# Altium PCB NL_PCB_L.PcbDoc (part 2 of 2)
Units mm, origin at the board's own origin, x right, y up, seen from the top; angles counter-clockwise.
Board outline 403.1 x 406.53 mm, 2 copper layers (Top Layer, Bottom Layer); 55 components, 40 nets, 196 pads, 161 vias.
Unrouted connection lines stored in the file: 46.
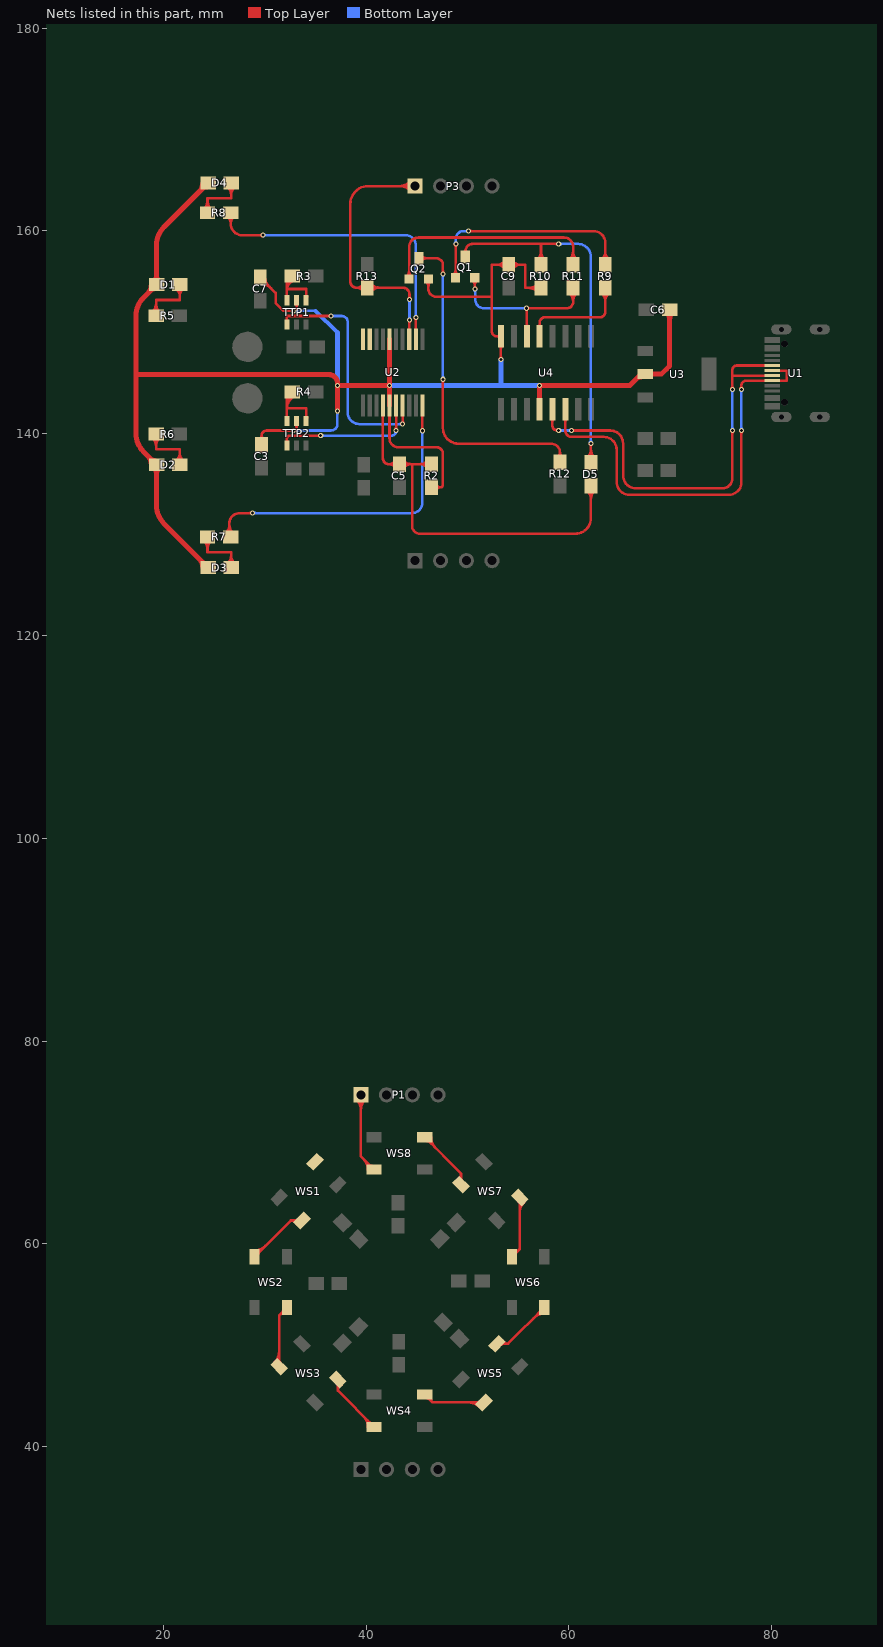
[diagram p2: the nets of this part, all layers, seen from the top]

## Via types
v1: diameter 0.5, hole 0.3, Top Layer to Bottom Layer, 117 vias
v2: diameter 0.7, hole 0.4, Top Layer to Bottom Layer, 40 vias
v3: diameter 0.8, hole 0.5, Top Layer to Bottom Layer, 4 vias

## Nets (pads, with @x,y where several pads share a name; then routed paths per layer and width w, separated by ;. In a path a pad name is that pad's centre, name@x,y a point inside that pad or via, vN(x,y) a via of type N, cw(c..) or ccw(c..) an arc to the next point about the centre after c; other vN are vias at no path point) (continued)
LED3: R7.2 U2.10 | length 35.1
  Top Layer w0.254: R7.2@26.133,130.128 ccw(c25.266,130.995) 26.492,130.995 ccw(c27.719,130.995) R7.2@26.851,130.128 ; R7.2@26.619,129.769 26.492,129.769 26.492,131.115 cw(c27.508,131.115) 27.508,132.131 v1(28.778,132.131) ; v1@28.691,132.044 ccw(c28.481,131.834) 28.481,132.131 ccw(c28.481,132.428) v1@28.691,132.218 ; v1@45.459,140.346 ccw(c45.249,140.556) 45.546,140.556 ccw(c45.843,140.556) v1@45.633,140.346 ; v1(45.546,140.259) U2.10@45.546,142.75
  Bottom Layer w0.254: v1(28.778,132.131) 44.53,132.131 ccw(c44.53,133.147) 45.546,133.147 v1(45.546,140.259) ; v1@28.865,132.044 cw(c29.075,131.834) 29.075,132.131 cw(c29.075,132.428) v1@28.865,132.218 ; v1@45.459,140.172 cw(c45.249,139.962) 45.546,139.962 cw(c45.843,139.962) v1@45.633,140.172
LED4: R8.2 U2.12 | length 33.2
  Top Layer w0.254: R8.2@26.299,161.378 cw(c25.753,160.706) 26.619,160.706 ; R8.2@26.619,161.773 26.619,160.706 ; R8.2@26.939,161.378 ccw(c27.485,160.706) 26.619,160.706 ; v1@29.707,159.476 ccw(c29.497,159.266) 29.497,159.563 ccw(c29.497,159.86) v1@29.707,159.65 ; v1(29.794,159.563) 27.762,159.563 cw(c27.762,160.706) 26.619,160.706 ; v1@44.809,151.348 cw(c44.599,151.138) 44.896,151.138 cw(c45.193,151.138) v1@44.983,151.348 ; U2.12@44.896,149.3 v1(44.896,151.435)
  Bottom Layer w0.254: v1(29.794,159.563) 43.88,159.563 cw(c43.88,158.547) 44.896,158.547 v1(44.896,151.435) ; v1@29.881,159.476 cw(c30.091,159.266) 30.091,159.563 cw(c30.091,159.86) v1@29.881,159.65 ; v1@44.809,151.522 ccw(c44.599,151.732) 44.896,151.732 ccw(c45.193,151.732) v1@44.983,151.522
MCU_RTS: C5.2 D5.1 R2.1 U2.4 | length 45.9
  Top Layer w0.254: U2.4@41.646,142.75 41.646,137.541 ccw(c42.231,137.541) 42.231,136.957 ; C5.2@42.883,136.641 ccw(c42.231,136.124) 42.231,136.957 ; C5.2@42.883,137.272 cw(c42.231,137.789) 42.231,136.957 ; C5.2@43.641,136.598 cw(c44.508,135.73) 44.508,136.957 cw(c44.508,138.183) C5.2@43.641,137.316 ; R2.1@46.097,136.598 ccw(c45.23,135.73) 45.23,136.957 ccw(c45.23,138.183) R2.1@46.097,137.316 ; R2.1@46.457,136.957 44.526,136.957 ; D5.1@61.82,134.337 cw(c60.953,133.47) 62.179,133.47 cw(c63.406,133.47) D5.1@62.538,134.337 ; D5.1@62.179,134.823 62.179,131.623 cw(c60.655,131.623) 60.655,130.099 45.288,130.099 cw(c45.288,130.861) 44.526,130.861 44.526,136.957 ; 42.231,136.957 C5.2@43.282,136.957 44.526,136.957
NET2: WS1.2
NetD1_2: D1.2 R5.1 | length 9.3
  Top Layer w0.254: R5.1@18.894,151.972 ccw(c18.027,152.839) 19.253,152.839 ccw(c20.48,152.839) R5.1@19.612,151.972 ; R5.1@19.253,151.613 19.253,153.162 21.59,153.162 D1.2@21.59,154.686 ; D1.2@21.231,154.327 cw(c20.364,153.46) 21.59,153.46 cw(c22.816,153.46) D1.2@21.949,154.327
NetD2_2: D2.2 R6.1 | length 9.2
  Top Layer w0.254: R6.1@18.894,139.569 cw(c18.027,138.702) 19.253,138.702 cw(c20.48,138.702) R6.1@19.612,139.569 ; R6.1@19.253,139.929 19.253,138.43 21.59,138.43 D2.2@21.59,136.906 ; D2.2@21.231,137.265 ccw(c20.364,138.132) 21.59,138.132 ccw(c22.816,138.132) D2.2@21.949,137.265
NetD3_2: D3.2 R7.1 | length 9.2
  Top Layer w0.254: R7.1@23.974,129.409 cw(c23.107,128.542) 24.333,128.542 cw(c25.56,128.542) R7.1@24.692,129.409 ; R7.1@24.333,129.769 24.333,128.27 26.67,128.27 D3.2@26.67,126.746 ; D3.2@26.311,127.105 ccw(c25.444,127.972) 26.67,127.972 ccw(c27.896,127.972) D3.2@27.029,127.105
NetD4_2: D4.2 R8.1 | length 9.1
  Top Layer w0.254: R8.1@23.974,162.132 ccw(c23.107,162.999) 24.333,162.999 ccw(c25.56,162.999) R8.1@24.692,162.132 ; R8.1@24.333,161.773 24.333,163.195 26.67,163.195 D4.2@26.67,164.719 ; D4.2@26.311,164.36 cw(c25.444,163.493) 26.67,163.493 cw(c27.896,163.493) D4.2@27.029,164.36
NetD5_2: D5.2 Q1.C R10.2 | length 42.9
  Top Layer w0.254: Q1.C@49.606,157.868 ccw(c49.365,158.286) 49.831,158.161 ; Q1.C@49.771,157.404 49.771,157.937 cw(c50.533,157.937) 50.533,158.699 57.252,158.699 ; 49.832,158.164 ccw(c50.1,158.092) Q1.C@49.95,157.859 ; R10.2@56.892,157.128 ccw(c56.025,157.995) 57.252,157.995 ccw(c58.478,157.995) R10.2@57.611,157.128 ; R10.2@57.252,156.642 57.252,158.699 ; v1@58.917,158.612 ccw(c58.707,158.402) 58.707,158.699 ccw(c58.707,158.996) v1@58.917,158.786 ; v1(59.004,158.699) 57.252,158.699 ; D5.2@61.82,137.595 ccw(c60.953,138.463) 62.179,138.463 ccw(c63.406,138.463) D5.2@62.538,137.595 ; v1@62.092,138.927 cw(c61.882,138.717) 62.179,138.717 cw(c62.476,138.717) v1@62.266,138.927 ; D5.2@62.179,137.109 v1(62.179,139.014)
  Bottom Layer w0.254: v1(59.004,158.699) 60.909,158.699 cw(c60.909,157.429) 62.179,157.429 v1(62.179,139.014) ; v1@59.091,158.612 cw(c59.301,158.402) 59.301,158.699 cw(c59.301,158.996) v1@59.091,158.786 ; v1@62.092,139.101 ccw(c61.882,139.311) 62.179,139.311 ccw(c62.476,139.311) v1@62.266,139.101
NetQ1_B: Q1.B R9.2 | length 27
  Top Layer w0.254: Q1.B@48.573,155.605 ccw(c47.917,156.261) 48.844,156.261 ; v1@48.757,158.612 cw(c48.547,158.402) 48.844,158.402 cw(c49.141,158.402) v1@48.931,158.612 ; Q1.B@48.844,155.27 v1(48.844,158.699) ; 48.844,156.077 ccw(c49.511,156.077) Q1.B@49.04,155.605 ; v1(50.114,159.969) 62.433,159.969 cw(c62.433,158.801) 63.602,158.801 R9.2@63.602,156.642 ; v1@50.201,159.882 cw(c50.411,159.672) 50.411,159.969 cw(c50.411,160.266) v1@50.201,160.056 ; R9.2@63.242,157.128 ccw(c62.375,157.995) 63.602,157.995 ccw(c64.828,157.995) R9.2@63.961,157.128
  Bottom Layer w0.254: v1@48.757,158.786 ccw(c48.547,158.996) 48.844,158.996 ccw(c49.141,158.996) v1@48.931,158.786 ; v1(48.844,158.699) 48.844,159.207 cw(c49.606,159.207) 49.606,159.969 v1(50.114,159.969) ; v1@50.027,159.882 ccw(c49.817,159.672) 49.817,159.969 ccw(c49.817,160.266) v1@50.027,160.056
NetQ1_e: Q1.E R11.2 U4.14 | length 22.7
  Top Layer w0.254: Q1.E@50.478,155.138 cw(c49.914,154.575) 50.711,154.575 cw(c51.508,154.575) Q1.E@50.945,155.138 ; 50.711,154.643 ccw(c51.138,154.643) v1@50.836,154.341 ; Q1.E@50.711,155.372 50.711,154.254 v1(50.749,154.254) ; U4.14@55.732,150.496 ccw(c55.437,150.791) 55.855,150.791 ccw(c56.272,150.791) U4.14@55.977,150.496 ; v1@55.742,152.262 cw(c55.471,151.991) 55.855,151.991 ; U4.14@55.855,149.574 55.855,152.349 59.817,152.349 ccw(c59.817,152.959) 60.427,152.959 R11.2@60.427,154.356 ; v1@55.916,152.262 cw(c56.126,152.052) 56.126,152.349 cw(c56.126,152.646) v1@55.916,152.436 ; R11.2@60.067,153.87 cw(c59.2,153.002) 60.427,153.002 cw(c61.653,153.002) R11.2@60.786,153.87
  Bottom Layer w0.254: v1@50.662,154.167 cw(c50.452,153.957) 50.749,153.957 cw(c51.046,153.957) v1@50.836,154.167 ; v1(50.749,154.254) 50.749,153.238 ccw(c51.638,153.238) 51.638,152.349 v1(55.829,152.349) ; v1@55.742,152.262 ccw(c55.532,152.052) 55.532,152.349 ccw(c55.532,152.646) v1@55.742,152.436
NetQ2_B: Q2.B R11.1 | length 25.4
  Top Layer w0.254: Q2.B@44.001,155.478 ccw(c43.437,156.042) 44.234,156.042 ccw(c45.031,156.042) Q2.B@44.468,155.478 ; Q2.B@44.234,155.245 44.234,158.407 cw(c45.161,158.407) 45.161,159.334 59.512,159.334 cw(c59.512,158.42) 60.427,158.42 R11.1@60.427,156.642 ; R11.1@60.067,157.128 ccw(c59.2,157.995) 60.427,157.995 ccw(c61.653,157.995) R11.1@60.786,157.128
NetQ2_C: Q2.C R12.2 | length 36.8
  Top Layer w0.254: Q2.C@45.199,157.277 46.939,157.277 cw(c46.939,156.642) 47.574,156.642 v1(47.574,155.753) ; Q2.C@45.433,157.043 cw(c45.996,156.48) 45.996,157.277 cw(c45.996,158.074) Q2.C@45.433,157.51 ; v1@47.487,145.252 cw(c47.277,145.042) 47.574,145.042 cw(c47.871,145.042) v1@47.661,145.252 ; v1@47.487,155.84 ccw(c47.277,156.05) 47.574,156.05 ccw(c47.871,156.05) v1@47.661,155.84 ; v1(47.574,145.339) 47.574,140.513 ccw(c49.098,140.513) 49.098,138.989 58.242,138.989 cw(c58.242,138.1) 59.131,138.1 ; R12.2@58.896,137.712 ccw(c58.694,138.1) 59.131,138.1 ; R12.2@59.131,137.135 59.131,138.1 ; R12.2@59.366,137.712 cw(c59.569,138.1) 59.131,138.1
  Bottom Layer w0.254: v1@47.487,145.426 ccw(c47.277,145.636) 47.574,145.636 ccw(c47.871,145.636) v1@47.661,145.426 ; v1@47.487,155.666 cw(c47.277,155.456) 47.574,155.456 cw(c47.871,155.456) v1@47.661,155.666 ; v1(47.574,145.339) v1(47.574,155.753)
NetR3_2: R3.2 TTP1.4 TTP1.6 | length 9.4
  Top Layer w0.254: TTP1.6@32.085,153.48 ccw(c31.875,153.69) 32.172,153.69 ccw(c32.469,153.69) TTP1.6@32.259,153.48 ; TTP1.6@32.172,153.143 32.172,154.254 ; 32.172,154.188 cw(c33.092,154.188) R3.2@32.767,155.049 ; 32.172,154.555 cw(c32.954,154.555) R3.2@32.678,155.287 ; R3.2@32.172,154.922 cw(c32.815,154.922) R3.2@32.588,155.524 ; R3.2@32.741,155.499 32.172,154.93 32.172,154.254 ; TTP1.4@33.985,153.48 ccw(c33.775,153.69) 34.072,153.69 ccw(c34.369,153.69) TTP1.4@34.159,153.48 ; TTP1.4@34.072,153.143 34.072,154.254 32.172,154.254
NetR4_2: R4.2 TTP2.4 TTP2.6 | length 10.1
  Top Layer w0.254: TTP2.6@32.085,141.542 ccw(c31.875,141.752) 32.172,141.752 ccw(c32.469,141.752) TTP2.6@32.259,141.542 ; TTP2.6@32.172,141.205 32.172,142.443 ; 32.172,142.392 cw(c33.694,142.392) R4.2@32.865,143.668 ; 32.172,142.859 cw(c33.39,142.859) R4.2@32.727,143.881 ; 32.172,143.327 cw(c33.086,143.327) R4.2@32.588,144.094 ; R4.2@32.172,143.551 32.172,142.443 ; TTP2.4@33.985,141.542 ccw(c33.775,141.752) 34.072,141.752 ccw(c34.369,141.752) TTP2.4@34.159,141.542 ; TTP2.4@34.072,141.205 34.072,142.484 32.212,142.484 32.172,142.443
NetR9_1: R9.1 U4.13 | length 13.4
  Top Layer w0.254: U4.13@57.002,150.496 ccw(c56.707,150.791) 57.125,150.791 ccw(c57.542,150.791) U4.13@57.247,150.496 ; U4.13@57.125,149.574 57.125,150.927 cw(c57.658,150.927) 57.658,151.46 63.068,151.46 ccw(c63.068,151.994) 63.602,151.994 R9.1@63.602,154.356 ; R9.1@63.242,153.87 cw(c62.375,153.002) 63.602,153.002 cw(c64.828,153.002) R9.1@63.961,153.87
NetWS1_4: WS1.4 WS2.2 | length 9.7
  Top Layer w0.254: WS2.2@28.982,58.71 32.563,62.291 ; WS2.2@28.982,59.079 ccw(c28.982,59.97) 29.612,59.34 ; WS2.2@28.982,59.333 ccw(c28.982,60.837) 30.045,59.774 ; WS2.2@29.355,58.96 cw(c29.652,58.96) WS2.2@29.442,59.17 ; WS1.4@32.99,62.291 cw(c32.99,61.843) WS1.4@33.384,62.058 ; WS1.4@33.014,62.291 ccw(c33.014,62.588) WS1.4@33.224,62.378 ; WS1.4@33.161,61.936 ccw(c32.563,61.611) 32.563,62.291 ; WS1.4@33.665,62.291 32.563,62.291
NetWS2_4: WS2.4 WS3.2 | length 9.7
  Top Layer w0.254: WS3.2@30.962,48.307 ccw(c29.898,49.37) 31.402,49.37 ; WS3.2@31.141,48.127 ccw(c30.511,48.757) 31.402,48.757 ; WS3.2@31.402,47.866 31.402,52.931 ; WS3.2@31.402,48.517 ccw(c31.699,48.517) WS3.2@31.489,48.307 ; WS2.4@31.705,53.233 cw(c32.021,52.916) WS2.4@32.148,53.346 ; WS2.4@31.722,53.25 ccw(c31.512,53.46) WS2.4@31.809,53.46 ; WS2.4@32.076,53.102 ccw(c31.884,52.449) 31.402,52.931 ; WS2.4@32.182,53.71 31.402,52.931
NetWS3_4: WS3.4 WS4.2 | length 9.8
  Top Layer w0.254: WS3.4@37.114,46.153 cw(c36.904,45.943) WS3.4@37.2,45.943 ; 37.2,45.475 cw(c37.91,45.475) WS3.4@37.561,46.092 ; WS3.4@37.2,45.91 cw(c37.664,45.91) WS3.4@37.436,46.313 ; WS3.4@37.2,46.594 37.2,45.491 WS4.2@40.782,41.91 ; 39.718,42.974 cw(c38.655,41.91) WS4.2@40.159,41.91 ; 40.152,42.54 cw(c39.522,41.91) WS4.2@40.413,41.91 ; WS4.2@40.322,42.37 ccw(c40.532,42.58) WS4.2@40.532,42.283
NetWS4_4: WS4.4 WS5.2 | length 9.7
  Top Layer w0.254: WS4.4@45.782,45.11 46.561,44.331 ; WS4.4@46.032,44.737 cw(c46.032,44.44) WS4.4@46.242,44.65 ; WS4.4@46.146,45.077 ccw(c46.575,44.95) WS4.4@46.259,44.633 ; WS4.4@46.389,45.005 ccw(c47.042,44.812) 46.561,44.331 ; 50.121,44.331 cw(c50.121,42.827) WS5.2@51.185,43.89 ; 50.735,44.331 cw(c50.735,43.44) WS5.2@51.365,44.07 ; WS5.2@50.975,44.331 ccw(c50.975,44.628) WS5.2@51.185,44.418 ; WS5.2@51.625,44.331 46.561,44.331
NetWS5_4: WS5.4 WS6.2 | length 9.7
  Top Layer w0.254: WS5.4@52.898,50.129 54,50.129 ; WS5.4@53.18,50.363 ccw(c53.573,50.577) WS5.4@53.573,50.129 ; WS5.4@53.339,50.042 cw(c53.549,49.832) WS5.4@53.549,50.129 ; WS5.4@53.403,50.484 ccw(c54,50.81) 54,50.129 ; 56.518,52.647 cw(c57.582,51.583) WS6.2@57.582,53.087 ; 56.952,53.08 cw(c57.582,52.45) WS6.2@57.582,53.341 ; WS6.2@57.122,53.25 ccw(c56.912,53.46) WS6.2@57.209,53.46 ; WS6.2@57.582,53.71 54,50.129
NetWS6_4: WS6.4 WS7.2 | length 9.7
  Top Layer w0.254: WS6.4@54.382,58.71 55.161,59.49 ; WS6.4@54.415,59.074 ccw(c54.542,59.504) WS6.4@54.859,59.187 ; WS6.4@54.487,59.318 ccw(c54.68,59.971) 55.161,59.49 ; WS6.4@54.755,58.96 cw(c55.052,58.96) WS6.4@54.842,59.17 ; WS7.2@55.074,64.114 cw(c54.864,63.904) WS7.2@55.161,63.904 ; 55.161,63.05 cw(c56.665,63.05) WS7.2@55.602,64.114 ; 55.161,63.663 cw(c56.052,63.663) WS7.2@55.422,64.293 ; WS7.2@55.161,64.554 55.161,59.49
NetWS7_4: WS7.4 WS8.2 | length 9.7
  Top Layer w0.254: WS8.2@45.782,70.51 49.363,66.929 ; WS8.2@46.032,70.137 cw(c46.032,69.84) WS8.2@46.242,70.05 ; WS8.2@46.151,70.51 ccw(c47.041,70.51) 46.412,69.88 ; WS8.2@46.405,70.51 ccw(c47.909,70.51) 46.845,69.447 ; WS7.4@49.008,66.331 ccw(c48.682,66.929) 49.363,66.929 ; WS7.4@49.129,66.108 ccw(c48.915,66.501) WS7.4@49.363,66.501 ; WS7.4@49.363,65.827 49.363,66.929 ; WS7.4@49.363,66.477 ccw(c49.66,66.477) WS7.4@49.45,66.267
PA0: TTP2.1 U2.6 | length 16.7
  Top Layer w0.254: TTP2.1@32.085,139.142 ccw(c31.875,139.352) 32.172,139.352 ccw(c32.469,139.352) TTP2.1@32.259,139.142 ; TTP2.1@32.172,138.805 32.172,139.487 cw(c32.461,139.487) 32.461,139.776 v1(35.509,139.776) ; v1@35.422,139.689 ccw(c35.212,139.479) 35.212,139.776 ccw(c35.212,140.073) v1@35.422,139.863 ; v1@42.859,140.371 ccw(c42.649,140.581) 42.946,140.581 ccw(c43.243,140.581) v1@43.033,140.371 ; v1(42.946,140.284) U2.6@42.946,142.75
  Bottom Layer w0.254: v1(35.509,139.776) 42.494,139.776 ccw(c42.494,140.228) 42.946,140.228 v1(42.946,140.284) ; v1@35.596,139.689 cw(c35.806,139.479) 35.806,139.776 cw(c35.806,140.073) v1@35.596,139.863 ; v1@42.852,140.205 cw(c42.702,140.077) 42.892,140.026 ; 42.892,140.027 cw(c43.131,139.963) v1@43.008,140.178
PA1: TTP1.1 U2.7 | length 26.3
  Top Layer w0.254: TTP1.1@32.085,151.08 ccw(c31.875,151.29) 32.172,151.29 ccw(c32.469,151.29) TTP1.1@32.259,151.08 ; TTP1.1@32.172,150.743 32.172,151.552 32.207,151.587 v1(36.525,151.587) ; v1@36.438,151.5 ccw(c36.228,151.29) 36.228,151.587 ccw(c36.228,151.884) v1@36.438,151.674 ; v1@43.509,141.006 ccw(c43.299,141.216) 43.596,141.216 ccw(c43.893,141.216) v1@43.683,141.006 ; v1(43.596,140.919) U2.7@43.596,142.75
  Bottom Layer w0.254: v1(36.525,151.587) 37.567,151.587 cw(c37.567,150.978) 38.176,150.978 38.176,142.062 ccw(c39.319,142.062) 39.319,140.919 v1(43.596,140.919) ; v1@36.612,151.5 cw(c36.822,151.29) 36.822,151.587 cw(c36.822,151.884) v1@36.612,151.674 ; v1@43.509,140.832 ccw(c43.299,140.622) 43.299,140.919 ccw(c43.299,141.216) v1@43.509,141.006
RGB_CTRL: P1.1 P3.1 R13.1 U2.13 WS8.4 | length 48.8
  Top Layer w0.254: P1.1@39.031,74.261 cw(c37.968,73.197) 39.472,73.197 cw(c40.976,73.197) P1.1@39.912,74.261 ; P1.1@39.211,74.44 cw(c38.581,73.811) 39.472,73.811 cw(c40.362,73.811) P1.1@39.733,74.44 ; P1.1@39.472,74.701 39.472,68.62 WS8.4@40.782,67.31 ; R13.1@39.712,154.061 ccw(c39.04,153.515) 39.04,154.381 ; R13.1@39.712,154.701 cw(c39.04,155.247) 39.04,154.381 ; 39.718,68.374 cw(c38.655,67.31) WS8.4@40.159,67.31 ; 40.152,67.94 cw(c39.522,67.31) WS8.4@40.413,67.31 ; WS8.4@40.322,67.77 ccw(c40.532,67.98) WS8.4@40.532,67.683 ; R13.1@40.466,154.022 cw(c41.333,153.155) 41.333,154.381 cw(c41.333,155.608) R13.1@40.466,154.74 ; v1@44.185,153.3 ccw(c43.975,153.51) 44.272,153.51 ccw(c44.569,153.51) v1@44.359,153.3 ; U2.13@44.246,149.3 44.246,151.181 v1(44.272,151.181) ; 44.246,150.821 cw(c44.632,150.821) v1@44.359,151.094 ; v1(44.272,153.213) 44.272,153.721 ccw(c43.612,153.721) 43.612,154.381 R13.1@40.107,154.381 39.04,154.381 ; P3.1@44.365,163.974 ccw(c43.302,162.91) 43.302,164.414 ccw(c43.302,165.918) P3.1@44.365,164.855 ; P3.1@44.545,164.153 ccw(c43.915,163.523) 43.915,164.414 ccw(c43.915,165.305) P3.1@44.545,164.675 ; P3.1@44.806,164.414 40.208,164.414 ccw(c40.208,162.636) 38.43,162.636 38.43,154.991 ccw(c39.04,154.991) 39.04,154.381
  Bottom Layer w0.254: v1@44.185,151.268 ccw(c43.975,151.478) 44.272,151.478 ccw(c44.569,151.478) v1@44.359,151.268 ; v1@44.185,153.126 cw(c43.975,152.916) 44.272,152.916 cw(c44.569,152.916) v1@44.359,153.126 ; v1(44.272,151.181) v1(44.272,153.213)
SWCLK: U2.20
SWDIO: U2.19
UD+: U1.5 U1.7 U4.5 | length 48.7
  Top Layer w0.254: U4.5@58.272,141.451 cw(c58.038,141.217) 58.369,141.217 ; 58.369,141.095 cw(c58.874,141.095) U4.5@58.517,141.451 ; U4.5@58.369,142.374 58.369,140.792 ccw(c58.877,140.792) v1@58.877,140.284 ; 58.678,140.338 ccw(c58.756,140.629) v1@58.932,140.384 ; v1(60.274,140.284) 64.084,140.284 cw(c64.084,139.014) 65.354,139.014 65.354,135.839 ccw(c66.624,135.839) 66.624,134.569 75.166,134.569 ccw(c75.166,135.552) 76.149,135.552 v1(76.149,140.284) ; v1@60.361,140.197 cw(c60.571,139.987) 60.571,140.284 cw(c60.571,140.581) v1@60.361,140.371 ; v1@76.062,140.197 cw(c75.852,139.987) 76.149,139.987 cw(c76.446,139.987) v1@76.236,140.197 ; v1@76.062,144.435 ccw(c75.852,144.645) 76.149,144.645 ccw(c76.446,144.645) v1@76.236,144.435 ; v1(76.149,144.348) 76.149,145.698 ; U1.7@80.575,145.698 76.149,145.698 ; U1.5@80.575,146.698 76.594,146.698 ccw(c76.594,146.253) 76.149,146.253 76.149,145.698
  Bottom Layer w0.254: v1(59.004,140.284) v1(60.274,140.284) ; v1@59.091,140.197 cw(c59.301,139.987) 59.301,140.284 cw(c59.301,140.581) v1@59.091,140.371 ; v1@60.187,140.197 ccw(c59.977,139.987) 59.977,140.284 ccw(c59.977,140.581) v1@60.187,140.371 ; v1@76.062,140.371 ccw(c75.852,140.581) 76.149,140.581 ccw(c76.446,140.581) v1@76.236,140.371 ; v1@76.062,144.261 cw(c75.852,144.051) 76.149,144.051 cw(c76.446,144.051) v1@76.236,144.261 ; v1(76.149,140.284) v1(76.149,144.348)
UD-: U1.6 U1.8 U4.6 | length 44.2
  Top Layer w0.254: U4.6@59.542,141.451 cw(c59.247,141.156) 59.665,141.156 cw(c60.082,141.156) U4.6@59.787,141.451 ; U4.6@59.665,142.374 59.665,140.259 ccw(c60.274,140.259) 60.274,139.649 63.449,139.649 cw(c63.449,138.379) 64.719,138.379 64.719,135.204 ccw(c65.989,135.204) 65.989,133.934 75.806,133.934 ccw(c75.806,135.166) 77.038,135.166 v1(77.038,140.284) ; v1@76.951,140.197 cw(c76.741,139.987) 77.038,139.987 cw(c77.335,139.987) v1@77.125,140.197 ; v1@76.951,144.435 ccw(c76.741,144.645) 77.038,144.645 ccw(c77.335,144.645) v1@77.125,144.435 ; v1(77.038,144.348) 77.038,144.706 cw(c77.531,144.706) 77.531,145.198 U1.8@80.075,145.198 81.509,145.198 81.509,146.198 U1.6@80.575,146.198
  Bottom Layer w0.254: v1@76.951,140.371 ccw(c76.741,140.581) 77.038,140.581 ccw(c77.335,140.581) v1@77.125,140.371 ; v1@76.951,144.261 cw(c76.741,144.051) 77.038,144.051 cw(c77.335,144.051) v1@77.125,144.261 ; v1@77.013,140.31 77.013,140.208 77.038,140.183 v1(77.038,140.284) v1(77.038,144.348)
VCC: C3.2 C6.2 C7.2 C9.2 D1.1 D2.1 D3.1 D4.1 Q2.E R2.2 R10.1 TTP1.5 TTP2.5 U2.5 U2.16 U3.2 U4.4 U4.16 | length 212.4
  Top Layer w0.254: C3.2@29.472,139.483 ccw(c29.35,139.776) 29.667,139.776 ; C7.2@29.54,154.762 cw(c29.54,153.229) 30.624,154.313 ; C7.2@29.54,155.016 cw(c29.54,154.096) 30.191,154.747 ; C7.2@29.54,155.397 31.064,153.873 31.064,152.857 31.826,152.095 v1(32.842,152.095) 33.122,152.375 TTP1.5@33.122,153.143 ; C3.2@29.667,139.205 29.667,139.776 ; C3.2@29.863,139.483 cw(c29.985,139.776) 29.667,139.776 ; C7.2@30.048,155.27 ccw(c30.968,155.27) 30.318,154.62 ; v1@32.755,140.197 ccw(c32.545,139.987) 32.545,140.284 ccw(c32.545,140.581) v1@32.755,140.371 ; v1@32.755,152.008 ccw(c32.545,151.798) 32.545,152.095 ccw(c32.545,152.392) v1@32.755,152.182 ; v1@32.842,152.218 ccw(c32.842,152.515) 33.052,152.305 ccw(c33.262,152.095) v1@32.965,152.095 ; TTP2.5@33.035,140.868 cw(c32.825,140.658) 33.122,140.658 cw(c33.419,140.658) TTP2.5@33.209,140.868 ; TTP1.5@33.035,152.806 cw(c32.825,152.596) 33.122,152.596 cw(c33.419,152.596) TTP1.5@33.209,152.806 ; TTP2.5@33.122,141.205 33.122,140.564 cw(c32.842,140.564) v1(32.842,140.284) 30.175,140.284 ccw(c30.175,139.776) 29.667,139.776 ; U2.5@42.296,142.75 42.296,139.497 ccw(c43.16,139.497) 43.16,138.633 46.914,138.633 cw(c46.914,137.973) 47.574,137.973 47.574,134.925 cw(c47.32,134.925) 47.32,134.671 ; Q2.E@45.906,155.011 cw(c45.342,154.448) 46.139,154.448 cw(c46.936,154.448) Q2.E@46.373,155.011 ; Q2.E@46.139,155.245 46.139,154.254 ccw(c46.901,154.254) 46.901,153.492 52.4,153.492 ; R2.2@46.457,134.671 47.32,134.671 ; R2.2@46.901,134.424 cw(c47.32,134.191) 47.32,134.671 ; R2.2@46.901,134.918 ccw(c47.32,135.151) 47.32,134.671 ; U4.16@53.19,149.454 ccw(c52.908,149.183) 52.908,149.574 ; U4.16@53.19,149.694 cw(c52.908,149.965) 52.908,149.574 ; U4.16@53.192,148.651 cw(c52.958,148.417) 53.289,148.417 ; v1@53.202,147.382 ccw(c52.992,147.592) 53.289,147.592 ccw(c53.586,147.592) v1@53.376,147.382 ; v1(53.289,147.295) 53.289,149.574 52.908,149.574 ; 53.289,148.295 cw(c53.794,148.295) U4.16@53.437,148.651 ; C9.2@53.717,156.283 ccw(c52.85,155.415) 52.85,156.642 ccw(c52.85,157.868) C9.2@53.717,157.001 ; C9.2@54.436,156.283 cw(c55.303,155.415) 55.303,156.642 cw(c55.303,157.868) C9.2@54.436,157.001 ; R10.1@56.892,153.997 ccw(c56.025,153.129) 56.025,154.356 ccw(c56.025,155.582) R10.1@56.892,154.715 ; R10.1@57.252,154.356 55.702,154.356 55.702,156.642 C9.2@54.077,156.642 52.4,156.642 52.4,153.492 ; U3.2@67.058,145.772 67.464,145.772 U3.2@67.539,145.847 ; 52.4,153.492 52.4,150.082 ccw(c52.908,150.082) 52.908,149.574
  Top Layer w0.5: 18.43,137.78 cw(c17.556,136.906) D2.1@18.792,136.906 ; 18.43,153.812 ccw(c17.556,154.686) D1.1@18.792,154.686 ; D2.1@18.737,137.473 ccw(c19.177,137.914) D2.1@19.177,137.291 ; D1.1@18.737,154.119 cw(c19.177,153.678) D1.1@19.177,154.301 ; D2.1@19.032,136.634 cw(c18.375,135.977) 19.304,135.977 cw(c20.233,135.977) D2.1@19.576,136.634 ; D1.1@19.032,154.958 ccw(c18.375,155.615) 19.304,155.615 ccw(c20.233,155.615) D1.1@19.576,154.958 ; 20.048,160.383 ccw(c21.844,158.587) 19.304,158.587 D1.1@19.304,154.686 18.016,153.398 ccw(c19.812,151.602) 17.272,151.602 17.272,145.796 ; 23.51,127.62 cw(c22.636,126.746) D3.1@23.872,126.746 ; D3.1@23.817,127.313 ccw(c24.257,127.754) D3.1@24.257,127.131 ; D3.1@24.384,126.746 20.048,131.082 cw(c21.844,132.878) 19.304,132.878 D2.1@19.304,136.906 18.016,138.194 cw(c19.812,139.99) 17.272,139.99 17.272,145.796 ; v1(37.16,142.189) v1(37.16,144.729) ; v1(42.291,144.729) v1(37.16,144.729) ; U2.5@42.296,142.75 U2.16@42.296,149.3 ; U4.4@57.125,142.374 v1(57.125,144.729) 66.015,144.729 U3.2@67.058,145.772 ; 66.607,145.322 cw(c67.284,144.645) U3.2@67.284,145.602 ; U3.2@67.539,145.847 69.139,145.847 69.952,146.66 C6.2@69.952,152.197 ; U3.2@67.967,145.674 cw(c68.385,145.255) 68.385,145.847 cw(c68.385,146.438) U3.2@67.967,146.02 ; C6.2@69.679,151.925 cw(c69.022,151.267) 69.952,151.267 cw(c70.881,151.267) C6.2@70.224,151.925 ; 17.272,145.796 36.322,145.796 cw(c36.322,144.958) 37.16,144.958 v1(37.16,144.729)
  Top Layer w0.52: 20.048,160.383 D4.1@24.384,164.719 ; 23.527,163.862 ccw(c22.67,164.719) D4.1@23.882,164.719 ; D4.1@23.834,164.169 cw(c24.257,163.745) D4.1@24.257,164.344
  Bottom Layer w0.254: v1(32.842,140.284) 36.525,140.284 ccw(c36.525,140.919) 37.16,140.919 v1(37.16,142.189) ; v1(32.842,152.095) 35.001,152.095 ; v1@32.929,140.197 cw(c33.139,139.987) 33.139,140.284 cw(c33.139,140.581) v1@32.929,140.371 ; v1@32.929,152.008 cw(c33.139,151.798) 33.139,152.095 cw(c33.139,152.392) v1@32.929,152.182 ; v1@37.073,142.102 cw(c36.863,141.892) 37.16,141.892 cw(c37.457,141.892) v1@37.247,142.102
  Bottom Layer w0.4: 35.001,152.095 37.16,149.936
  Bottom Layer w0.5: v1(37.16,144.729) 37.16,149.936 ; v1(42.291,144.729) 53.289,144.729 ; v1(53.289,147.295) 53.289,144.729 ; v1(57.125,144.729) 53.289,144.729
pads on no net: U1. U1.0 U1.1@81.295,143.058 U1.3 U1.4 U1.9 U1.10 U2.2 U2.3 U2.11 U2.14 U3.4 U4.7 U4.8 U4.9 U4.10 U4.11 U4.12

## Keep-outs
Keep-Out Layer:
  circle w0.127: c43.298,56.21 r1
  circle w0.127: c58.279,72.202 r1.5
  circle w0.127: c28.279,72.202 r1.5
  circle w0.127: c28.279,40.202 r1.5
  circle w0.127: c58.279,40.202 r1.5
  circle w0.127: c43.279,56.202 r33
  circle w0.127: c63.613,161.93 r1.5
  circle w0.127: c33.613,161.93 r1.5
  circle w0.127: c33.613,129.93 r1.5
  circle w0.127: c63.613,129.93 r1.5
  lines w0.127: 87.605,140.945 87.605,150.927 ; 87.613,140.93 78.613,140.93 78.613,132.182 cw(c48.613,145.93) 53.599,113.309 ccw(c48.613,112.93) 43.628,113.309 cw(c48.613,145.93) 43.628,178.551 ccw(c48.613,178.93) 53.599,178.551 cw(c48.613,145.93) 78.613,159.678 78.613,150.93 87.613,150.93

## Silkscreen, mask and mechanical layers (free items; w line width, h text height)
Top Overlay:
  lines w0.203: 41.097,76.378 41.097,78.283 48.336,78.283 ; 46.482,166.091 46.482,167.996 53.721,167.996 ; 48.336,78.283 48.336,80.188 38.176,80.188 38.176,78.283 38.176,76.378 48.336,76.378 48.336,78.283 ; 53.721,167.996 53.721,166.091 43.561,166.091 43.561,167.996 43.561,169.901 53.721,169.901 53.721,167.996 ; 38.202,34.366 38.202,36.144 48.362,36.144 48.362,34.366 38.202,34.366 ; 43.51,124.028 53.67,124.028 53.67,125.806 43.51,125.806 43.51,124.028
  text "RGB-CTRL" at 44.069,168.504 h1.02
  text "VCC-5V" at 47.244,166.472 h1.02
  text "GND" at 47.066,124.409 h1.02
  text "RGB-CTRL" at 38.684,78.791 h1.02
  text "VCC-5V" at 41.859,76.759 h1.02
  text "GND" at 41.758,34.747 h1.02
Bottom Overlay:
  drawing of 5738 lines, arcs and shapes, not listed
  text "Night Light V1.2" at 75.489,150.139 h1.52
  text "2019-01-18" at 74.447,147.574 h1.52
Mechanical 1:
  circle w0.127: c919.383,745.614 r1
  circle w0.127: c959.383,761.614 r1.5
  circle w0.127: c929.383,761.614 r1.5
  circle w0.127: c929.383,729.614 r1.5
  circle w0.127: c959.383,729.614 r1.5
  circle w0.127: c860.566,761.069 r1
  circle w0.127: c900.566,777.069 r1.5
  circle w0.127: c870.566,777.069 r1.5
  circle w0.127: c870.566,745.069 r1.5
  circle w0.127: c900.566,745.069 r1.5
  lines w0.127: 880.266,741.069 890.866,741.069 890.866,744.069 880.266,744.069 880.266,741.069 ; 880.266,778.069 890.866,778.069 890.866,781.069 880.266,781.069 880.266,778.069 ; 939.083,725.614 949.683,725.614 949.683,728.614 939.083,728.614 939.083,725.614 ; 939.083,762.614 949.683,762.614 949.683,765.614 939.083,765.614 939.083,762.614